# Altium PCB NBP-28 Pin_Swap_Example.PcbDoc (part 2 of 4)
Units mil, origin at the board's own origin, x right, y up, seen from the top; angles counter-clockwise.
Board outline 2716.54 x 3916.86 mil, 10 copper layers (Top Layer, Mid-Layer 1, VCC1V2, Mid-Layer 2, VCC, GND, MidLayer4, VCCINT, Mid-Layer 3, Bottom Layer), stack 81 mil thick; 230 components, 429 nets, 1587 pads, 770 vias.
Unrouted connection lines stored in the file: 563.
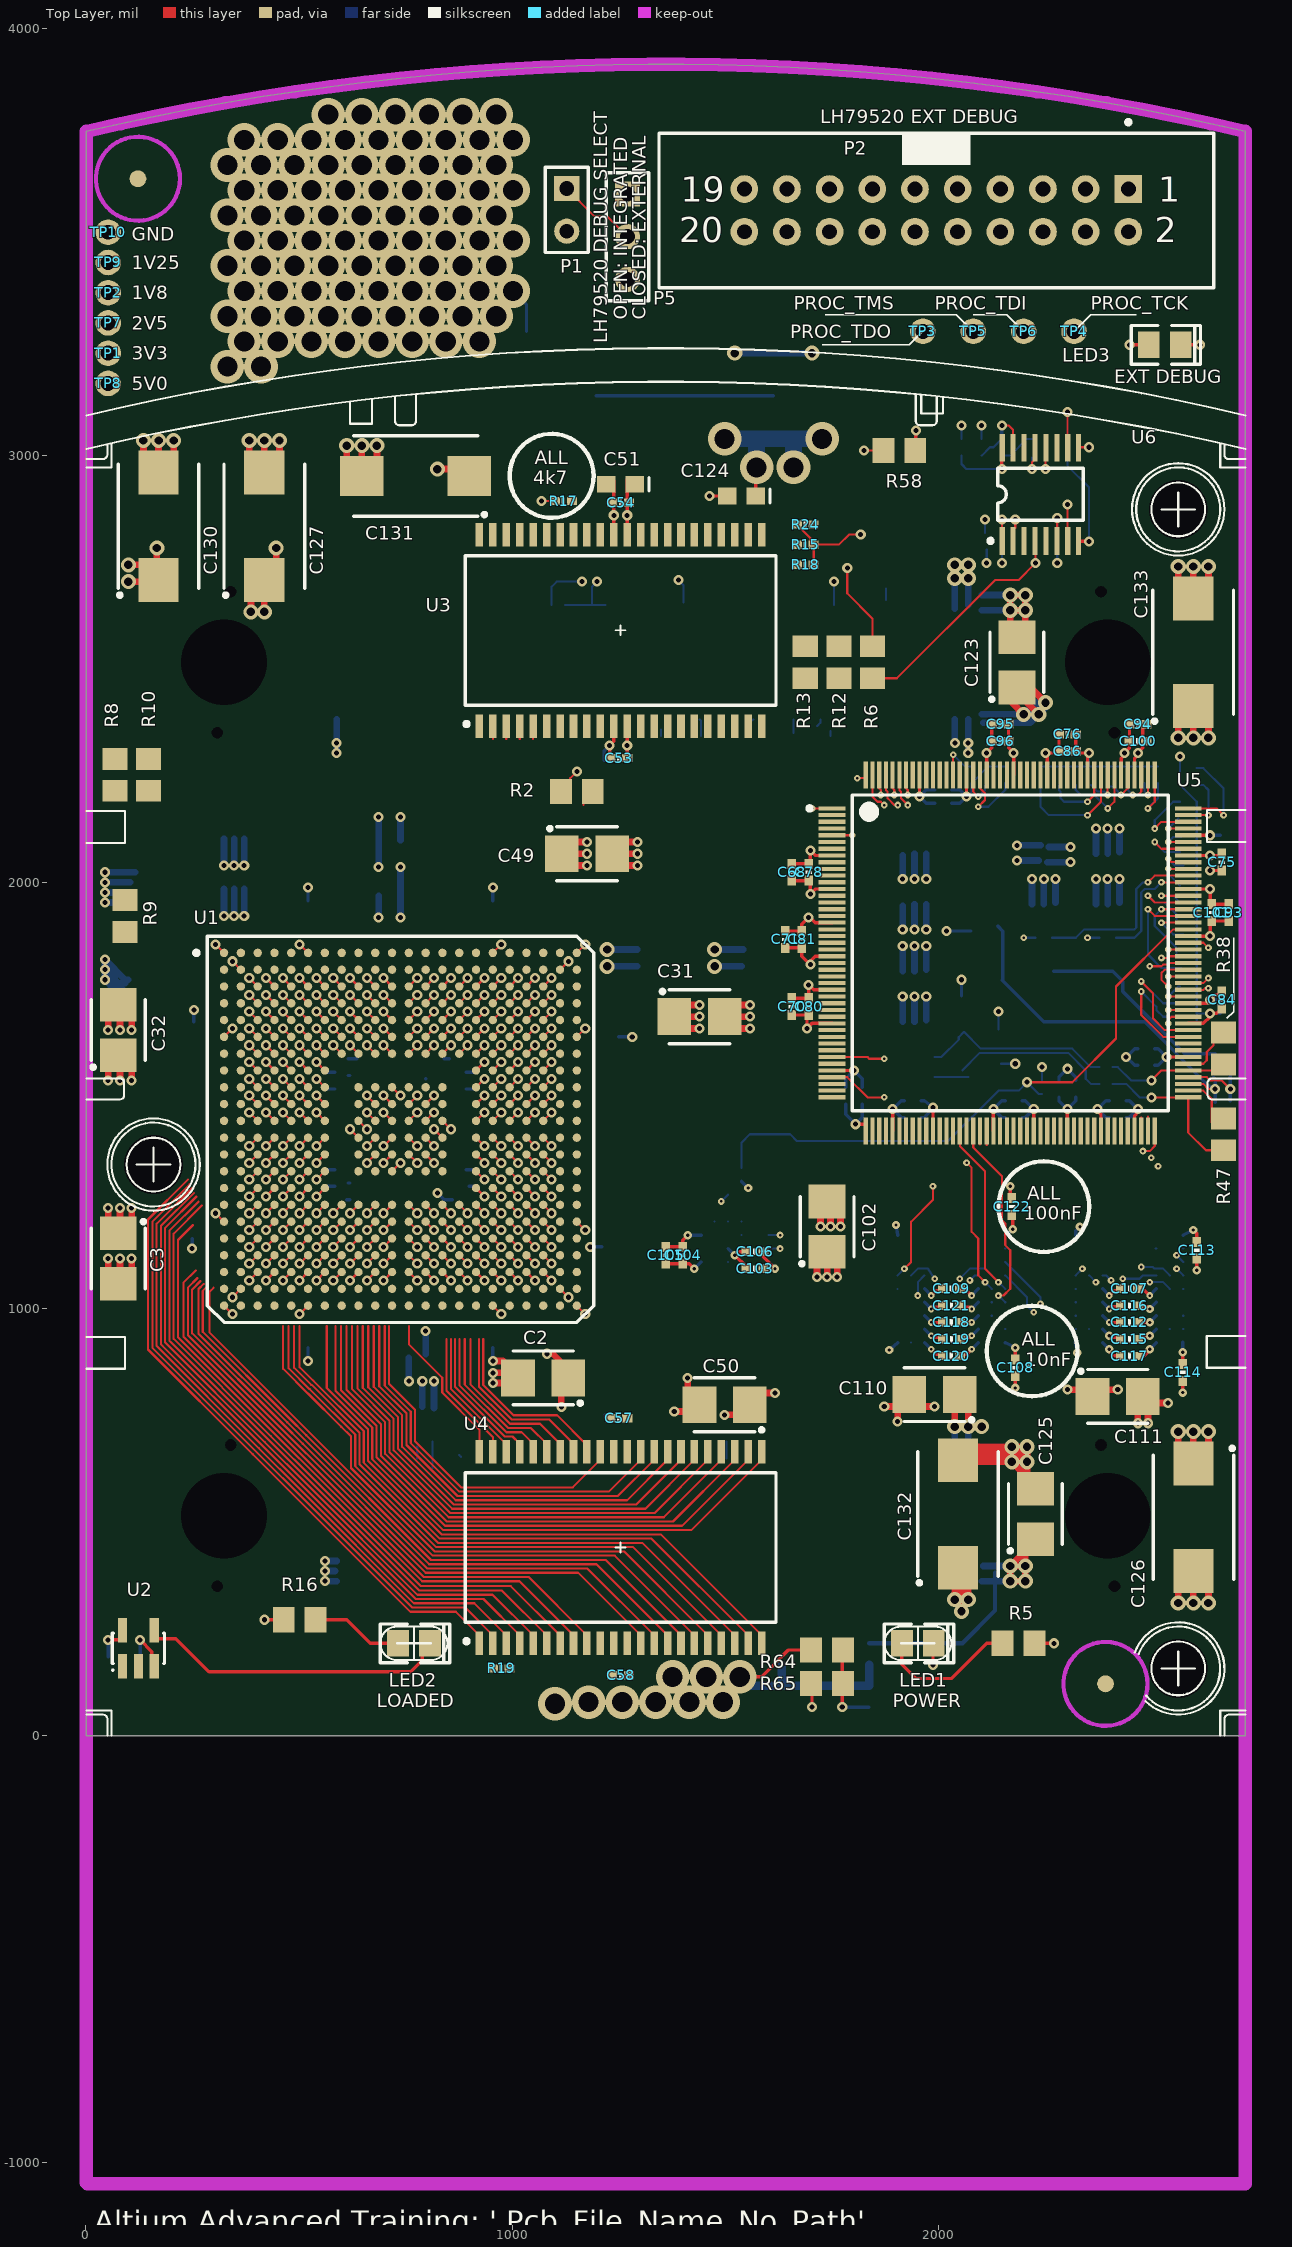
[diagram p0: Top Layer view]

## Via types
v1: diameter 23.62, hole 11.81, Top Layer to Bottom Layer, 495 vias
v2: diameter 78.74, hole 47.24, Top Layer to Bottom Layer, 101 vias
v3: diameter 15.75, hole 5.91, Top Layer to Bottom Layer, 92 vias
v4: diameter 35.43, hole 19.68, Top Layer to Bottom Layer, 59 vias
v5: diameter 19.68, hole 7.87, Top Layer to Bottom Layer, 23 vias

## Nets (pads, with @x,y where several pads share a name; then routed paths per layer and width w, separated by ;. In a path a pad name is that pad's centre, name@x,y a point inside that pad or via, vN(x,y) a via of type N, cw(c..) or ccw(c..) an arc to the next point about the centre after c; other vN are vias at no path point) (continued)
FLASH_BUSY: (continued)
  Bottom Layer w5: U8.C4@1537.11,1330.41 1537.11,1389.47 1556.8,1409.15 1651.29,1409.15 1667.04,1393.41 2021.37,1393.41 2139.48,1511.52 2186.72,1511.52 v1(2206.41,1531.2) 2233.96,1503.64 R20.1@2241.84,1503.64
FPGA_AUX0: R14.1 U1.B3
FPGA_AUX0_R: HDR1.86 R14.2
FPGA_AUX1: HDR1.88 U1.B20
FPGA_AUX2: HDR1.90 U1.C20 | length 27.8
  Top Layer w5: U1.C20@1072.55,1755.61 v1(1092.23,1775.3)
FPGA_AUX3: HDR1.92 U1.D20 | length 27.8
  Top Layer w5: U1.D20@1072.55,1716.24 v1(1092.23,1735.93)
FPGA_CCLK: R3.2 U1.AA22
FPGA_CCLK_R: HDR1.66 R3.1
FPGA_CLK: HDR2.2 U1.W3 | length 27.8
  Top Layer w5: v1(383.57,1106) U1.W3@403.26,1125.69
FPGA_CLK_1: HDR1.30 U1.G5 | length 27.8
  Top Layer w5: v1(462.31,1617.82) U1.G5@482,1598.13
FPGA_CLK_2: HDR1.32 U1.D6 | length 27.8
  Top Layer w5: v1(501.68,1735.93) U1.D6@521.37,1716.24
FPGA_DIN: HDR1.64 U1.B15
FPGA_DONE: R4.2 R15.1 U1.AB21 U2.2
FPGA_DONE_R: HDR1.74 R4.1
FPGA_INIT: HDR1.68 R18.1 R19.1
FPGA_M0: R8.2 U1.AB2
FPGA_M0_R: HDR1.60 R8.1
FPGA_M1: R9.2 U1.AA1
FPGA_M1_R: HDR1.58 R9.1
FPGA_M2: R10.2 U1.AB3
FPGA_M2_R: HDR1.56 R10.1
FPGA_PROGRAM_R: HDR1.62 R7.1 R17.1
FPGA_PROGRAMP: R7.2 U1.A2
FPGA_TCK: HDR1.72 R12.1 U6.11
FPGA_TCKP: R12.2 U1.A21
FPGA_TDI: HDR1.78 R11.1
FPGA_TDIP: R11.2 U1.B1

## Text inside footprints (layer, text, board x,y; h text height)
P2: Top Overlay "19" at 1395.38,3594.19 h59.06; Top Overlay "20" at 1391.45,3499.7 h59.06; Top Overlay "1" at 2513.49,3594.19 h59.06; Top Overlay "2" at 2505.62,3499.7 h59.06
U3: Mechanical 15 "12.8" at 883.57,2543.01 h35.43 r90; Mechanical 15 "10.0" at 966.25,2543.01 h35.43 r90
U4: Mechanical 15 "12.8" at 883.57,393.41 h35.43 r90; Mechanical 15 "10.0" at 966.25,393.41 h35.43 r90
U11: Bottom Overlay "2" at 1796.96,3125.69 h31.5; Bottom Overlay "3" at 1800.89,3027.26 h31.5; Bottom Overlay "1" at 1789.08,3224.11 h31.5